# Altium PCB BMS_Slave_8S V0.1.PcbDoc (part 2 of 2)
Units mil, origin at the board's own origin, x right, y up, seen from the top; angles counter-clockwise.
Board outline 2125.98 x 4185.04 mil, 4 copper layers (Top Layer, L2 (GND), L2 (PWR), Bottom Layer), stack 53.912 mil thick; 165 components, 120 nets, 437 pads, 149 vias.
Unrouted connection lines stored in the file: 123.
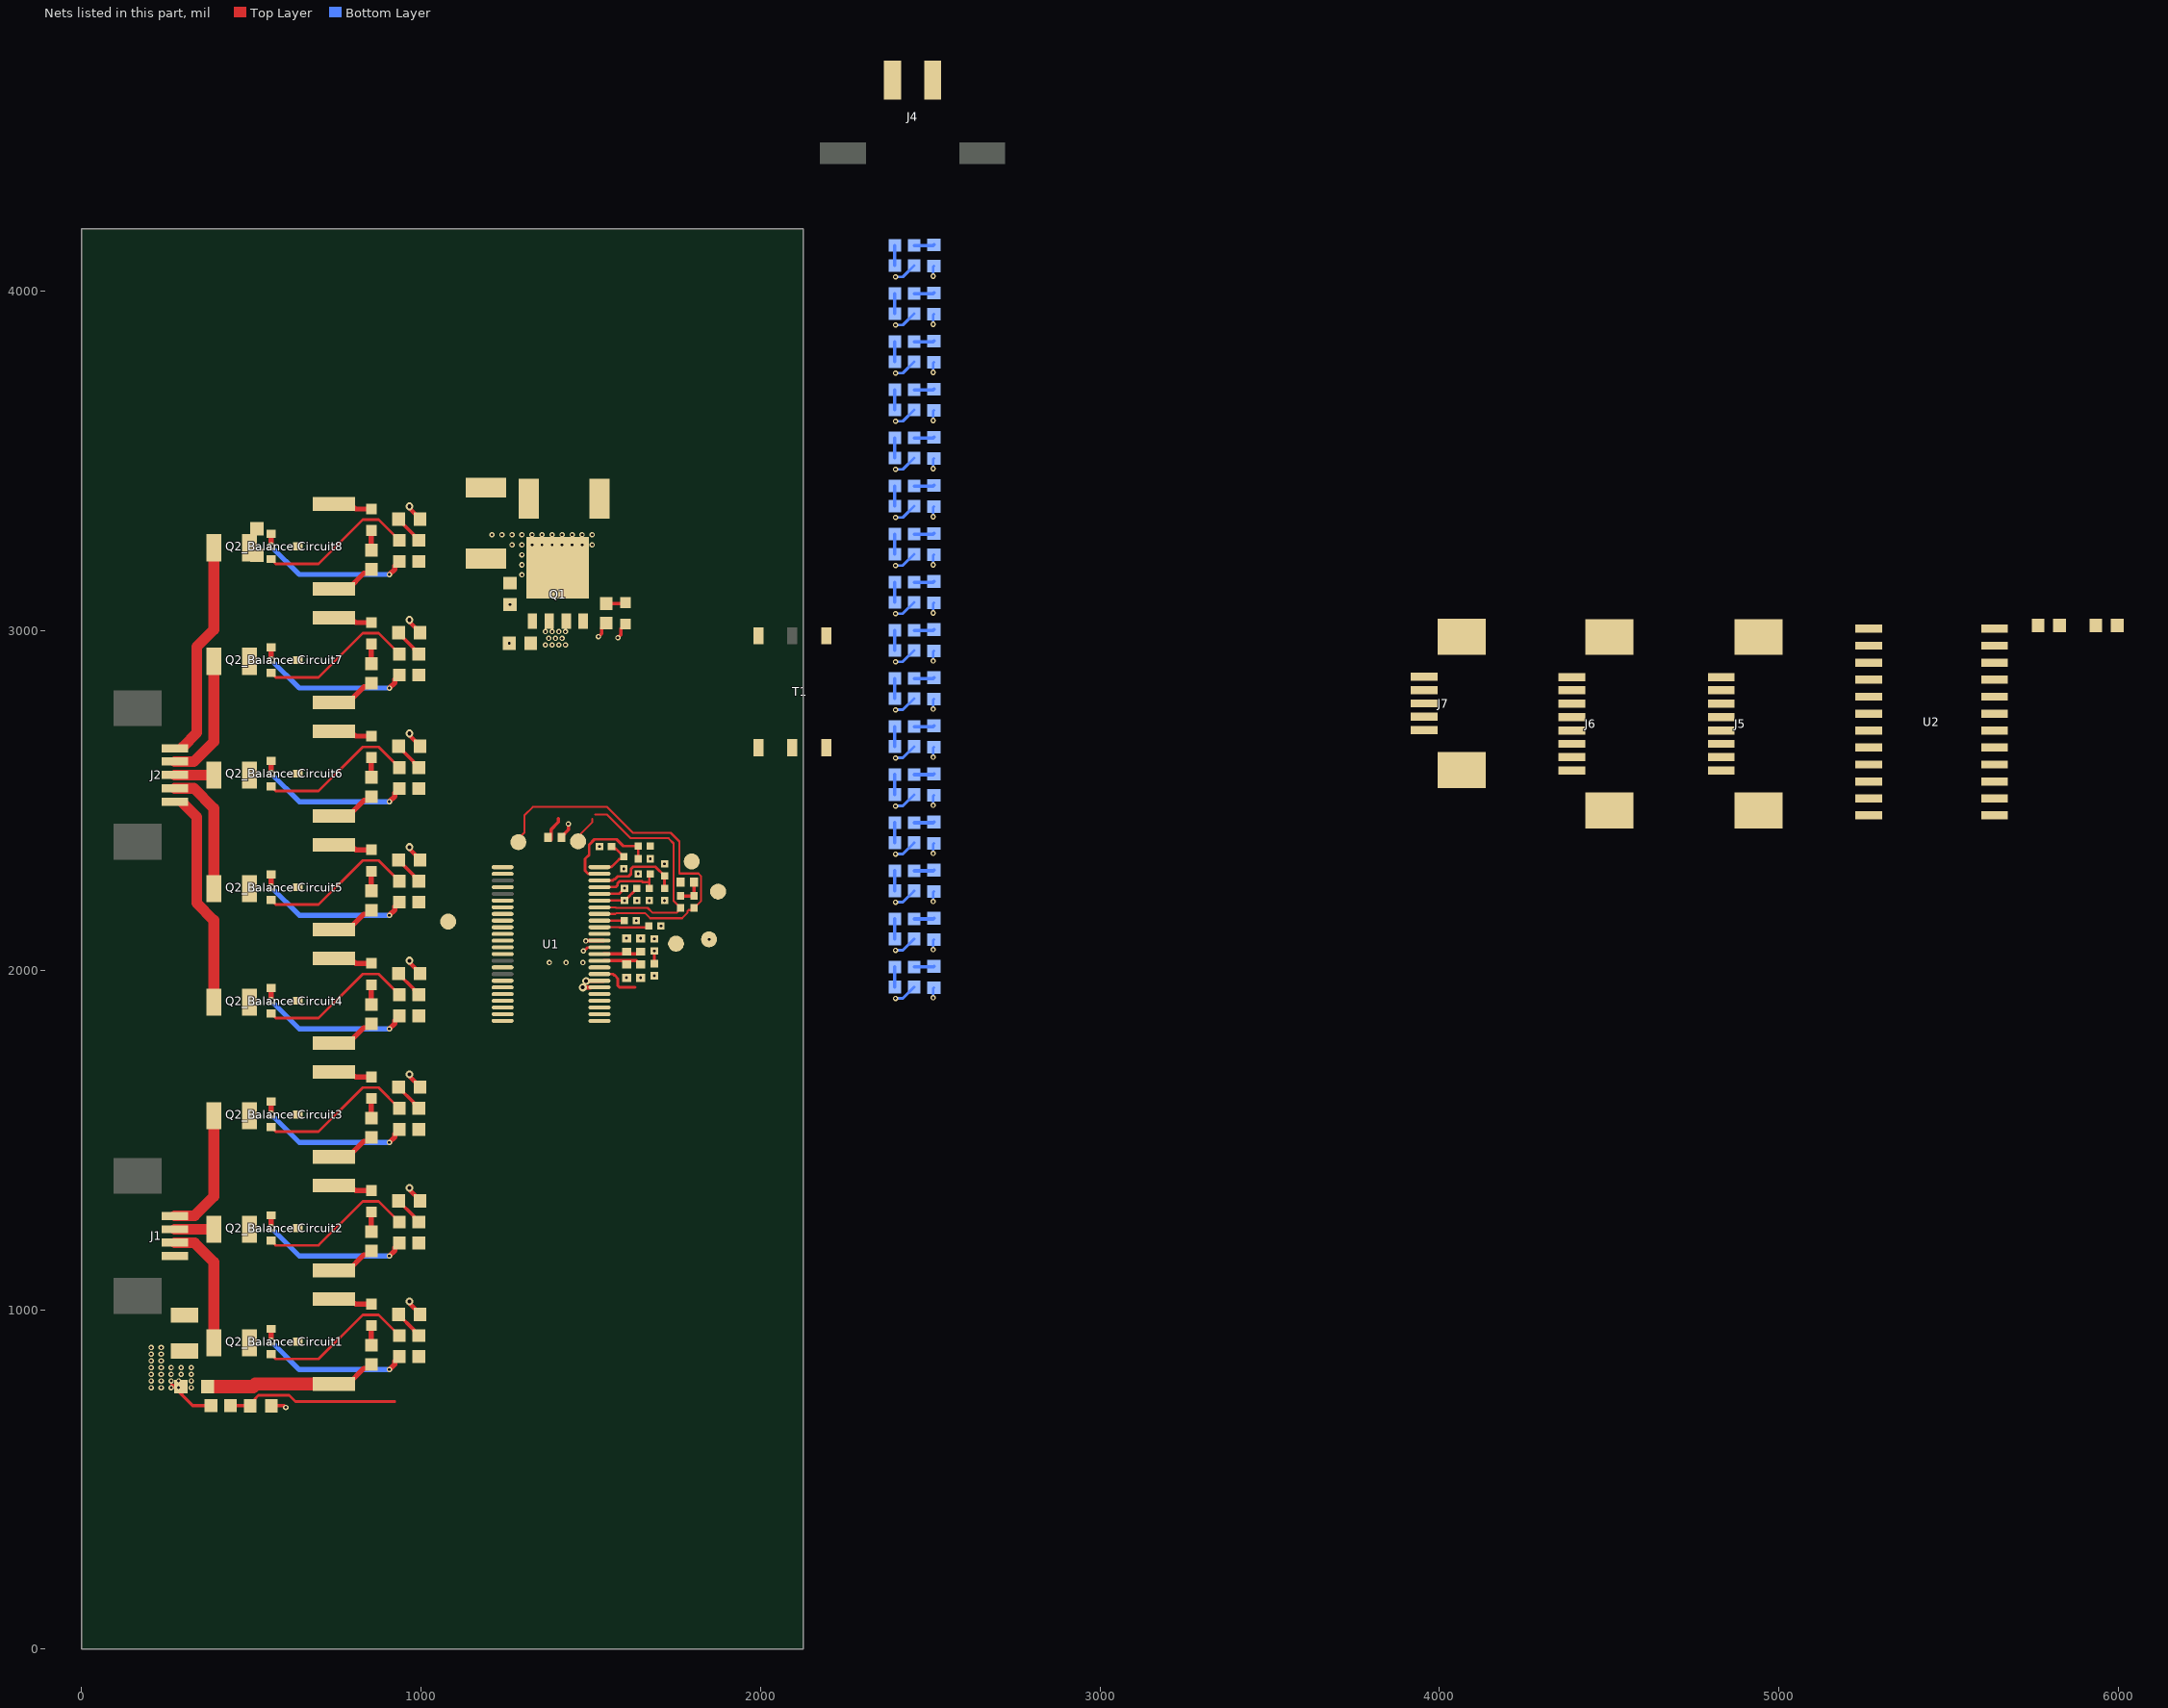
[diagram p4: the nets of this part, all layers, seen from the top]

## Part data
C1 C6: library part Capacitor, "Capacitor", Voltage=>60V, ComponentLink1Description="New link"
C2 C3 C4 C5 C8 C9 C10 C11 "C13_NTC Sense1" "C13_NTC Sense2" "C13_NTC Sense3" "C13_NTC Sense4" "C13_NTC Sense5" "C13_NTC Sense6" "C13_NTC Sense7" "C13_NTC Sense8" "C13_NTC Sense9" "C13_NTC Sense10" "C13_NTC Sense11" "C13_NTC Sense12" "C13_NTC Sense13" "C13_NTC Sense14" "C13_NTC Sense15" "C13_NTC Sense16": library part Capacitor, "Capacitor", ComponentLink1Description="New link"
C7: library part Capacitor, "Capacitor", Voltage=<50.4V, ComponentLink1Description="New link"
"C12_Balance Circuit1" "C12_Balance Circuit2" "C12_Balance Circuit3" "C12_Balance Circuit4" "C12_Balance Circuit5" "C12_Balance Circuit6" "C12_Balance Circuit7" "C12_Balance Circuit8": library part Capacitor, "Capacitor", Voltage=>50.4V, ComponentLink1Description="New link"
D1: "LED RED DIFFUSED 0603 SMD", Case Code (Imperial)=0603, Case Code (Metric)=1608, Color=Red, Forward Voltage=2V, Manufacturer="Wurth Electronics", Supplier Part Number 1=710-150060SS55040, Test Current=20mA, Case/Package=0603, Category=LEDs, Dominant Wavelength=630nm, Height=0.5mm, Length=1.6mm, Lens Size=0.8mm, Lens Style=Flat, Lens Transparency=Diffused, Luminous Intensity=70mcd, Manufacturer Part Number=150060SS55040, Mount="Surface Mount", Packaging="Tape and Reel", Pricing 1="1=0.18000, 10=0.16800, 50=0.16800, 100=0.15200, 1000=0.12100, 10000=0.10600 (USD)", RoHS=No, RoHS Compliant=No, Stock 1=17006, Supplier 1=Mouser, Viewing Angle=140°, Width=0.8mm
"D2_Balance Circuit1" "D2_Balance Circuit2" "D2_Balance Circuit3" "D2_Balance Circuit4" "D2_Balance Circuit5" "D2_Balance Circuit6" "D2_Balance Circuit7" "D2_Balance Circuit8": "LED BLUE DIFFUSED 0603 SMD", Case/Package=0603, Color=Blue, Forward Voltage=3.2V, Manufacturer="Wurth Electronics", Supplier Part Number 1=710-150060BS55040, Test Current=20mA, ComponentLink1Description=http://www.farnell.com/datasheets/2621640.pdf?src-supplier=Farnell, ComponentLink1URL=http://www.farnell.com/datasheets/2621640.pdf?src-supplier=Farnell, ComponentLink2Description=https://www.we-online.de/web/en/index.php/download/media/07_electronic_components/download_center_1/application_notes_berichte/ano002_leds___the_future_of_horticultural_lighting/ANO002b_EN_LEDs_The_Future_of_Horticultural_Lighting.pdf?src-supplier=Digi-Key, ComponentLink2URL=https://www.we-online.de/web/en/index.php/download/media/07_electronic_components/download_center_1/application_notes_berichte/ano002_leds___the_future_of_horticultural_lighting/ANO002b_EN_LEDs_The_Future_of_Horticultural_Lighting.pdf?src-supplier=Digi-Key, ComponentLink3Description=https://katalog.we-online.de/pbs/datasheet/150060BS55040.pdf?src-supplier=Digi-Key, ComponentLink3URL=https://katalog.we-online.de/pbs/datasheet/150060BS55040.pdf?src-supplier=Digi-Key, ComponentLink4Description=http://www.farnell.com/datasheets/2621640.pdf?src-supplier=Newark, ComponentLink4URL=http://www.farnell.com/datasheets/2621640.pdf?src-supplier=Newark, Dominant Wavelength=470nm, Height=0.5mm, Length=1.6mm, Lens Size=0.8mm, Lens Style=Flat, Lens Transparency=Diffused, Luminous Intensity=80mcd, Manufacturer Part Number=150060BS55040, Mount="Surface Mount", Packaging="Tape and Reel", Pricing 1="1=0.18000, 10=0.16800, 50=0.16800, 100=0.15200, 1000=0.12100, 10000=0.10600 (USD)", RoHS=No, RoHS Compliant=No, Supplier 1=Mouser, Viewing Angle=140°, Width=0.8mm
F1 "F2_Balance Circuit1" "F2_Balance Circuit2" "F2_Balance Circuit3" "F2_Balance Circuit4" "F2_Balance Circuit5" "F2_Balance Circuit6" "F2_Balance Circuit7" "F2_Balance Circuit8": library part "Fuse 2", "LITTELFUSE - 0466.500NR - Fuse, Surface Mount, 500 mA, 466 Series, 63 VAC, 63 VDC, Very Fast Acting, 1206", Case Code (Imperial)=1206, Case Code (Metric)=3216, Current Rating=500mA, DC Cold Resistance=248mR, Manufacturer=Littelfuse, Max Operating Temperature=90°C, Min Operating Temperature=-55°C, Package Quantity=5000, Resistance=350mR, Supplier Part Number 1=576-0466.500NR, Voltage Rating=63V, Approvals=UL,CSA, Body Material=Thermoplastic, Case/Package=1206, Category=Fuses, ComponentLink1Description=https://datasheet.ciiva.com/17081/0466-500nr-17081083.pdf?src-supplier=Allied+Electronics, ComponentLink1URL=https://datasheet.ciiva.com/17081/0466-500nr-17081083.pdf?src-supplier=Allied+Electronics, ComponentLink2Description=https://datasheet.ciiva.com/16327/littelfuse-fuse-466-16327478.pdf?src-supplier=Future+Electronics, ComponentLink2URL=https://datasheet.ciiva.com/16327/littelfuse-fuse-466-16327478.pdf?src-supplier=Future+Electronics, ComponentLink3Description=https://datasheet.ciiva.com/299/466seriesdrawing-299207.pdf?src-supplier=Digi-Key, ComponentLink3URL=https://datasheet.ciiva.com/299/466seriesdrawing-299207.pdf?src-supplier=Digi-Key, ComponentLink4Description=https://datasheet.ciiva.com/299/466seriesdrawing-299208.pdf?src-supplier=Digi-Key, ComponentLink4URL=https://datasheet.ciiva.com/299/466seriesdrawing-299208.pdf?src-supplier=Digi-Key, ComponentLink5Description=https://datasheet.ciiva.com/299/466seriesdrawing-299209.pdf?src-supplier=Digi-Key, ComponentLink5URL=https://datasheet.ciiva.com/299/466seriesdrawing-299209.pdf?src-supplier=Digi-Key, ComponentLink6Description=https://datasheet.ciiva.com/14102/ei466-dat-e-14102891.pdf?src-supplier=Distrelec, ComponentLink6URL=https://datasheet.ciiva.com/14102/ei466-dat-e-14102891.pdf?src-supplier=Distrelec, ComponentLink7Description=https://datasheet.ciiva.com/15186/getdatasheetpartid-57351-15186924.pdf?src-supplier=Verical, ComponentLink7URL=https://datasheet.ciiva.com/15186/getdatasheetpartid-57351-15186924.pdf?src-supplier=Verical, Depth=1.52mm, Fuse Current=500mA, Fuse Type="Board Mount (Cartridge Style Excluded)", Height=0.023inch, Housing Material=Ceramic, LatestRevisionDate=17-Jul-2002, LatestRevisionNote="Re-released for DXP Platform.", Lead Free="Lead Free", Length=3.18mm, Manufacturer Part Number=0466.500NR, Mount="Surface Mount", Number of Pins=2, PackageDescription="Thru-Hole; 2 Leads", PackageReference=PIN-W2/E2.8, Packaging="Tape and Reel", Pricing 1="1=0.77000, 10=0.59200, 50=0.59200, 100=0.48900, 1000=0.41600, 10000=0.39000 (USD)", Published=8-Jun-2000, Publisher="Altium Limited", Radiation Hardening=No, REACH SVHC=Unknown, RoHS=Yes, RoHS Compliant=Yes, Series=466, Stock 1=36497, Supplier 1=Mouser, Terminal Material=Copper, Termination=SMD/SMT, Voltage Rating (AC)=63V, Voltage Rating (DC)=63V, Width=0.06inch, Working Voltage=63V
J1: "FPC Connectors, Flex-to-Board, 4 Position, .039 in [1 mm] Centerline, Zero Insertion Force (ZIF), Right Angle, Surface Mount", Package=None, Availability=Unavailable, MF="{'manufacturer': u'TE Connectivity'}", MP=84953-4, Price=None
J2 J7: "FPC Connectors, Flex-to-Board, 5 Position, .039 in [1 mm] Centerline, Zero Insertion Force (ZIF), Right Angle, Surface Mount."
J4: "CONN HEADER 3MM 2POS R/A TIN SMD", Package=None, Availability=Unavailable, MF="{'manufacturer': u'TE Connectivity'}", MP=2-1445057-2, Price=None
J5 J6: "FPC Connectors, Flex-to-Board, 8 Position, .039 in [1 mm] Centerline, Zero Insertion Force (ZIF), Right Angle, Surface Mount", Color=Natural, Contact Current Rating=1A, Flammability Rating="UL94 V-0", Manufacturer="TE Connectivity", Max Operating Temperature=85°C, Min Operating Temperature=-40°C, Package Quantity=1500, Supplier Part Number 1=5351707P, Voltage Rating=200V, Body Plating=Tin, Category="FFC / FPC", ComponentLink1Description=https://datasheet.ciiva.com/11745/0900766b806b36e9-11745458.pdf?src-supplier=RSComponents, ComponentLink1URL=https://datasheet.ciiva.com/11745/0900766b806b36e9-11745458.pdf?src-supplier=RSComponents, ComponentLink2Description=https://datasheet.ciiva.com/669/eng-cd-84953-a3-669123.pdf?src-supplier=Digi-Key, ComponentLink2URL=https://datasheet.ciiva.com/669/eng-cd-84953-a3-669123.pdf?src-supplier=Digi-Key, ComponentLink3Description=https://datasheet.ciiva.com/669/eng-cd-84953-a3-669124.pdf?src-supplier=Digi-Key, ComponentLink3URL=https://datasheet.ciiva.com/669/eng-cd-84953-a3-669124.pdf?src-supplier=Digi-Key, ComponentLink4Description=https://datasheet.ciiva.com/14483/eng-ds-1-1773440-6-0506-14483319.pdf?src-supplier=Farnell, ComponentLink4URL=https://datasheet.ciiva.com/14483/eng-ds-1-1773440-6-0506-14483319.pdf?src-supplier=Farnell, ComponentLink5Description=https://datasheet.ciiva.com/26825/getdatasheetpartid-473787-26825575.pdf?src-supplier=Verical, ComponentLink5URL=https://datasheet.ciiva.com/26825/getdatasheetpartid-473787-26825575.pdf?src-supplier=Verical, ComponentLink6Description=https://datasheet.ciiva.com/8066/586796-8066664.pdf?src-supplier=Element14, ComponentLink6URL=https://datasheet.ciiva.com/8066/586796-8066664.pdf?src-supplier=Element14, ComponentLink7Description=https://datasheet.ciiva.com/669/eng-cd-84953-a3-669122.pdf?src-supplier=Digi-Key, ComponentLink7URL=https://datasheet.ciiva.com/669/eng-cd-84953-a3-669122.pdf?src-supplier=Digi-Key, ComponentLink8Description=https://datasheet.ciiva.com/16658/eng-ds-1-1773440-6-0506-16658613.pdf?src-supplier=Avnet+Europe, ComponentLink8URL=https://datasheet.ciiva.com/16658/eng-ds-1-1773440-6-0506-16658613.pdf?src-supplier=Avnet+Europe, ComponentLink9Description=https://datasheet.ciiva.com/8066/586796-8066666.pdf?src-supplier=Element14, ComponentLink9URL=https://datasheet.ciiva.com/8066/586796-8066666.pdf?src-supplier=Element14, ComponentLink10Description=https://datasheet.ciiva.com/30100/eng-ds-1-1773440-6-0506-30100492.pdf?src-supplier=Onlinecomponents.com, ComponentLink10URL=https://datasheet.ciiva.com/30100/eng-ds-1-1773440-6-0506-30100492.pdf?src-supplier=Onlinecomponents.com, ComponentLink11Description=https://datasheet.ciiva.com/10034/eng-ds-1-1773440-6-0506-10034351.pdf?src-supplier=Avnet, ComponentLink11URL=https://datasheet.ciiva.com/10034/eng-ds-1-1773440-6-0506-10034351.pdf?src-supplier=Avnet, Connector System=Flex-to-Board, Connector Type=Receptacle,Connector,Socket, Contact Location=Top, Contact Material=Bronze, Contact Plating=Tin,Bright, Current Rating=1A, Depth=2.56mm, Gender=Female, Height=2.56mm, Housing Color=Natural, Housing Material=Polymer, Lead Pitch=1mm, Length=0.6268inch, Manufacturer Part Number=84953-8, Material=Thermoplastic, Mating Alignment="Yes (With)", Mount="Surface Mount", Number of Contacts=8, Number of Positions=8, Number of Rows=1, Orientation="Right Angle", Packaging="Tape and Reel", PCB Mount Alignment="No (Without)", PCB Mount Retention=With, PCB Mounting Orientation="Right Angle", Pitch=0.039inch, Plating Thickness=2um, Pricing 1="10=0.83500, 200=0.65000, 750=0.58600, 3000=0.55400, 6000=0.54000 (USD)", Radiation Hardening=No, REACH SVHC="No SVHC", RoHS=Yes, Sealable="No (Without)", Shielding=Unshielded, Shrouded="Yes (With)", Stock 1=1, Supplier 1=RSComponents, Termination=SMD/SMT, Width=0.2575inch, Wire/Cable Type="Flat Flex"
Q1: "60V, 3 A NPN high power bipolar transistor"
"Q2_Balance Circuit1" "Q2_Balance Circuit2" "Q2_Balance Circuit3" "Q2_Balance Circuit4" "Q2_Balance Circuit5" "Q2_Balance Circuit6" "Q2_Balance Circuit7" "Q2_Balance Circuit8": library part CMP-14409-000018-1, "MOSFET P-CH 20V 2A TO-236AB"
T1: "BMS XFORMER 1-CH 1000V AECQ +125", Inductance=150uH, Manufacturer=Bourns, Max Operating Temperature=125°C, Min Operating Temperature=-40°C, Supplier Part Number 1=1802382, Category=Transformers, ComponentLink1Description=https://www.bourns.com/docs/Product-Datasheets/SM91502AL.pdf?src-supplier=Digi-Key, ComponentLink1URL=https://www.bourns.com/docs/Product-Datasheets/SM91502AL.pdf?src-supplier=Digi-Key, Manufacturer Part Number=SM91502ALE, Mount="Surface Mount", Packaging="Cut Tape", Pricing 1="800=2.35100 (USD)", RoHS=Yes, Stock 1=1, Supplier 1=RSComponents, Turns Ratio=1:1
TP1 TP2 TP3 TP4 TP5 TP6 TP7: library part "Test Point", "1.2mm Test point"
U1: "12 Channel Multicell Battery Monitor with Addressable Interface"
U2: "High-Speed CMOS Logic / 16-Channel Analog Multiplexer/Demultiplexer"

## Via types
v1: diameter 15.75, hole 7.87, Top Layer to Bottom Layer, tented both sides, 131 vias
v2: diameter 23.62, hole 11.81, Top Layer to Bottom Layer, tented both sides, 18 vias

## Nets (pads, with @x,y where several pads share a name; then routed paths per layer and width w, separated by ;. In a path a pad name is that pad's centre, name@x,y a point inside that pad or via, vN(x,y) a via of type N, cw(c..) or ccw(c..) an arc to the next point about the centre after c; other vN are vias at no path point)
5V0: C6.2 C10.1 C11.2 Q1.1 Q1.2 Q1.3 R2.2 R4.2 R5.2 R10.2 R11.2 R12.2 R13.2 R18.2 TP3.1 U1.37 U2.24 | length 102.3
  Top Layer w10: v1(1522.64,2983.27) 1531.57,2992.2 1531.57,3009.92 R4.2@1545.28,3023.62
  Top Layer w12: v1(1485.24,2086.61) 1486.13,2087.5 1537.31,2087.5 U1.37@1537.4,2087.6
  other v1: 1687.01,1984.25 1848.43,2091.54 1706.69,2130.9 1633.86,2146.65 1639.76,2284.45 1717.19,2313.98 1525.59,2365.16 1366.14,2958.66 1385.83,2958.66 1405.51,2958.66 1425.2,2958.66 1375.98,2978.35 1395.67,2978.35 1415.35,2978.35 1366.14,2998.03 1385.83,2998.03 1405.51,2998.03 1425.2,2998.03
A0: R10.1 R14.2 U1.45 | length 184.2
  Top Layer w8: U1.45@1537.4,2245.08 1538.13,2245.81 1573.9,2245.81 1578.58,2250.49 1578.58,2256.11 1585.42,2262.95 1650.8,2262.95 1653.91,2259.84 1672.24,2259.84 ; R14.2@1672.24,2241.14 1672.24,2259.84 ; R10.1@1672.24,2278.54 1672.24,2259.84
A1: R11.1 R15.2 U1.46 | length 253.8
  Top Layer w8: U1.46@1537.4,2264.76 1565.01,2264.76 1568.79,2268.54 1571.22,2268.54 1579.63,2276.95 1611.31,2276.95 1618.6,2284.24 1618.6,2299.08 1624.79,2305.28 1690.17,2305.28 1696.19,2299.25 1696.19,2299.18 1702.22,2293.15 1702.59,2293.15 R11.1@1717.2,2278.54 R15.2@1717.2,2241.14
A2: R12.1 R16.2 U1.47 | length 336.4
  Top Layer w8: U1.47@1537.4,2284.45 1536.67,2285.18 1491.98,2285.18 1483.11,2294.05 1483.11,2328.58 1494.92,2340.39 1494.92,2370.28 1510.62,2385.98 1575.99,2385.98 1595.84,2366.14 R12.1@1639.76,2366.14 R16.2@1639.76,2328.74
A3: R13.1 R17.2 U1.48 | length 121.7
  Top Layer w8: U1.48@1537.4,2304.13 1538.13,2304.86 1559.78,2304.86 1560.82,2305.89 1562.01,2305.89 1583.93,2327.82 1590.61,2327.82 R17.2@1597.44,2334.65 1573.76,2358.33 1567.85,2358.33 R13.1@1561.02,2365.16
B1: "R23_Balance Circuit1.1" "R24_Balance Circuit1.1" NT1.2 | length 489.5
  Top Layer w15: 742.87,781.5 785.39,781.5 831.28,827.38 842.15,827.38 853.35,838.58
  Top Layer w39.37: NT1.2@390.75,773.62 504.47,773.62 512.35,781.5 742.87,781.5
B2: "F2_Balance Circuit1.2" "Q2_Balance Circuit1.2" "R21_Balance Circuit1.1" "R23_Balance Circuit2.1" "R24_Balance Circuit2.1" | length 623.6
  Top Layer w8: 558.07,869.09 571.85,855.31 697.83,855.31 827.76,985.24 875,985.24 936.02,924.21
  Top Layer w15: 742.87,1116.14 785.39,1116.14 831.28,1162.03 ; 831.28,1162.03 842.15,1162.03 ; 831.28,1162.03 842.15,1162.03 ; 842.15,1162.03 853.35,1173.23 842.15,1162.03
B3: "F2_Balance Circuit2.2" "Q2_Balance Circuit2.2" "R21_Balance Circuit2.1" "R23_Balance Circuit3.1" "R24_Balance Circuit3.1" | length 623.6
  Top Layer w8: 558.07,1203.74 571.85,1189.96 697.83,1189.96 827.76,1319.88 875,1319.88 936.02,1258.86
  Top Layer w15: 742.87,1450.79 785.39,1450.79 831.28,1496.67 ; 831.28,1496.67 842.15,1496.67 ; 831.28,1496.67 842.15,1496.67 ; 842.15,1496.67 853.35,1507.87 842.15,1496.67
B4: "F2_Balance Circuit3.2" "Q2_Balance Circuit3.2" "R21_Balance Circuit3.1" "R23_Balance Circuit4.1" "R24_Balance Circuit4.1" | length 623.6
  Top Layer w8: 558.07,1538.39 571.85,1524.61 697.83,1524.61 827.76,1654.53 875,1654.53 936.02,1593.5
  Top Layer w15: 742.87,1785.43 785.39,1785.43 831.28,1831.32 ; 831.28,1831.32 842.15,1831.32 ; 831.28,1831.32 842.15,1831.32 ; 842.15,1831.32 853.35,1842.52 842.15,1831.32
B5: "F2_Balance Circuit4.2" "Q2_Balance Circuit4.2" "R21_Balance Circuit4.1" "R23_Balance Circuit5.1" "R24_Balance Circuit5.1" | length 623.6
  Top Layer w8: 558.07,1873.03 571.85,1859.25 697.83,1859.25 827.76,1989.17 875,1989.17 936.02,1928.15
  Top Layer w15: 742.87,2120.08 785.39,2120.08 831.28,2165.96 ; 831.28,2165.96 842.15,2165.96 ; 831.28,2165.96 842.15,2165.96 ; 842.15,2165.96 853.35,2177.17 842.15,2165.96
B6: "F2_Balance Circuit5.2" "Q2_Balance Circuit5.2" "R21_Balance Circuit5.1" "R23_Balance Circuit6.1" "R24_Balance Circuit6.1" | length 623.6
  Top Layer w8: 558.07,2207.68 571.85,2193.9 697.83,2193.9 827.76,2323.82 875,2323.82 936.02,2262.8
  Top Layer w15: 742.87,2454.72 785.39,2454.72 831.28,2500.61 ; 831.28,2500.61 842.15,2500.61 ; 831.28,2500.61 842.15,2500.61 ; 842.15,2500.61 853.35,2511.81 842.15,2500.61
B7: "F2_Balance Circuit6.2" "Q2_Balance Circuit6.2" "R21_Balance Circuit6.1" "R23_Balance Circuit7.1" "R24_Balance Circuit7.1" | length 623.6
  Top Layer w8: 558.07,2542.32 571.85,2528.54 697.83,2528.54 827.76,2658.46 875,2658.46 936.02,2597.44
  Top Layer w15: 742.87,2789.37 785.39,2789.37 831.28,2835.26 ; 831.28,2835.26 842.15,2835.26 ; 831.28,2835.26 842.15,2835.26 ; 842.15,2835.26 853.35,2846.46 842.15,2835.26
B8: "F2_Balance Circuit7.2" "Q2_Balance Circuit7.2" "R21_Balance Circuit7.1" "R23_Balance Circuit8.1" "R24_Balance Circuit8.1" | length 623.6
  Top Layer w8: 558.07,2876.97 571.85,2863.19 697.83,2863.19 827.76,2993.11 875,2993.11 936.02,2932.09
  Top Layer w15: 742.87,3124.02 785.39,3124.02 831.28,3169.9 ; 831.28,3169.9 842.15,3169.9 ; 831.28,3169.9 842.15,3169.9 ; 842.15,3169.9 853.35,3181.1 842.15,3169.9
C0: C7.2 R21.2 U1.26 | length 482.1
  Top Layer w8: 510.37,737.54 520.71,747.88 611.38,747.88 629.53,729.73 922.39,729.73
  Top Layer w10: R21.2@437.99,717.92 495.67,717.92 C7.2@496.06,717.52
C1: "C12_Balance Circuit1.2" "R21_Balance Circuit1.2" U1.24 | length 66.3
  Top Layer w10: 933.82,986.73 933.82,985.75 978.41,941.16 978.41,938.91
C2: "C12_Balance Circuit2.2" "R21_Balance Circuit2.2" U1.22 | length 66.3
  Top Layer w10: 933.82,1321.38 933.82,1320.39 978.41,1275.8 978.41,1273.56
C3: "C12_Balance Circuit3.2" "R21_Balance Circuit3.2" U1.20 | length 66.3
  Top Layer w10: 933.82,1656.02 933.82,1655.04 978.41,1610.45 978.41,1608.2
C4: "C12_Balance Circuit4.2" "R21_Balance Circuit4.2" U1.14 U1.16 U1.18 | length 66.3
  Top Layer w10: 933.82,1990.67 933.82,1989.68 978.41,1945.09 978.41,1942.85
C5: "C12_Balance Circuit5.2" "R21_Balance Circuit5.2" U1.12 | length 66.3
  Top Layer w10: 933.82,2325.32 933.82,2324.33 978.41,2279.74 978.41,2277.5
C6: "C12_Balance Circuit6.2" "R21_Balance Circuit6.2" U1.10 | length 66.3
  Top Layer w10: 933.82,2659.96 933.82,2658.98 978.41,2614.39 978.41,2612.14
C7: "C12_Balance Circuit7.2" "R21_Balance Circuit7.2" U1.8 | length 66.3
  Top Layer w10: 933.82,2994.61 933.82,2993.62 978.41,2949.03 978.41,2946.79
C8: "C12_Balance Circuit8.2" "R21_Balance Circuit8.2" U1.2 U1.4 U1.6 | length 66.3
  Top Layer w10: 933.82,3329.25 933.82,3328.27 978.41,3283.68 978.41,3281.43
Drive: Q1.4 U1.38
GND: "C12_Balance Circuit1.1" "C12_Balance Circuit2.1" "C12_Balance Circuit3.1" "C12_Balance Circuit4.1" "C12_Balance Circuit5.1" "C12_Balance Circuit6.1" "C12_Balance Circuit7.1" "C12_Balance Circuit8.1" "C13_NTC Sense1.1" "C13_NTC Sense2.1" "C13_NTC Sense3.1" "C13_NTC Sense4.1" "C13_NTC Sense5.1" "C13_NTC Sense6.1" "C13_NTC Sense7.1" "C13_NTC Sense8.1" "C13_NTC Sense9.1" "C13_NTC Sense10.1" "C13_NTC Sense11.1" "C13_NTC Sense12.1" "C13_NTC Sense13.1" "C13_NTC Sense14.1" "C13_NTC Sense15.1" "C13_NTC Sense16.1" C1.1 C2.1 C3.1 C4.1 C5.1 C6.1 C7.1 C8.1 C9.1 C10.2 C11.1 D1.1 F1.2 J5.6 J5.7 J5.8 J5.S1 J5.S2 J6.8 J6.S1 J6.S2 J7.5 J7.S1 J7.S2 NT1.1 R6.1 R7.2 R14.1 R15.1 R16.1 R17.1 R21.1 U1.30 U1.31 U2.12 U2.15 | length 1248.2
  Top Layer w10: 266.73,778.54 327.36,717.92 R21.1@380.91,717.92 ; C7.1@559.06,717.52 596.46,717.52 v1(601.38,712.6) ; C9.1@1413.39,2391.73 1413.39,2393.7 1433.7,2414.02 v1(1433.7,2431.73) ; v1(1579.72,2980.31) 1588.66,2989.25 1588.66,3006.97 D1.1@1602.36,3020.67
  Top Layer w12: v2(965.55,1024.61) 967.77,1022.38 967.77,1016.75 996.81,987.72 996.81,986.73 ; v2(965.55,1359.25) 967.77,1357.03 967.77,1351.4 996.81,1322.36 996.81,1321.38 ; v2(965.55,1693.9) 967.77,1691.67 967.77,1686.04 996.81,1657.01 996.81,1656.02 ; v2(965.55,2028.54) 967.77,2026.32 967.77,2020.69 996.81,1991.65 996.81,1990.67 ; v2(965.55,2363.19) 967.77,2360.97 967.77,2355.34 996.81,2326.3 996.81,2325.32 ; v2(965.55,2697.83) 967.77,2695.61 967.77,2689.98 996.81,2660.95 996.81,2659.96 ; v2(965.55,3032.48) 967.77,3030.26 967.77,3024.63 996.81,2995.59 996.81,2994.61 ; v2(965.55,3367.13) 967.77,3364.9 967.77,3359.27 996.81,3330.24 996.81,3329.25 ; v2(1476.38,1949.8) U1.30@1499.11,1949.8 ; v2(1486.22,1968.5) 1487.2,1969.49 U1.31@1537.4,1969.49
  Bottom Layer w8: v1(2508.86,1919.29) 2508.86,1946.85 2510.83,1948.82 ; v1(2508.86,2061.02) 2508.86,2088.58 2510.83,2090.55 ; v1(2508.86,2202.76) 2508.86,2230.31 2510.83,2232.28 ; v1(2508.86,2344.49) 2508.86,2372.05 2510.83,2374.02 ; v1(2508.86,2486.22) 2508.86,2513.78 2510.83,2515.75 ; v1(2508.86,2627.95) 2508.86,2655.51 2510.83,2657.48 ; v1(2508.86,2769.68) 2508.86,2797.24 2510.83,2799.21 ; v1(2508.86,2911.42) 2508.86,2938.98 2510.83,2940.95 ; v1(2508.86,3053.15) 2508.86,3080.71 2510.83,3082.68 ; v1(2508.86,3194.88) 2508.86,3222.44 2510.83,3224.41 ; v1(2508.86,3336.61) 2508.86,3364.17 2510.83,3366.14 ; v1(2508.86,3478.35) 2508.86,3505.91 2510.83,3507.87 ; v1(2508.86,3620.08) 2508.86,3647.64 2510.83,3649.61 ; v1(2508.86,3761.81) 2508.86,3789.37 2510.83,3791.34 ; v1(2508.86,3903.54) 2508.86,3931.1 2510.83,3933.07 ; v1(2508.86,4045.28) 2508.86,4072.83 2510.83,4074.8
  other v1: 204.73,770.67 234.25,770.67 263.78,770.67 285.43,770.67 322.84,770.67 204.73,790.36 234.25,790.36 263.78,790.36 285.43,790.36 322.84,790.36 204.73,810.04 234.25,810.04 263.78,810.04 293.31,810.04 322.84,810.04 204.73,829.73 234.25,829.73 263.78,829.73 293.31,829.73 322.84,829.73 204.73,849.41 234.25,849.41 204.73,869.1 234.25,869.1 204.72,888.78 234.25,888.78 1605.32,1978.35 1646.65,1978.35 1687.01,2092.52 1605.32,2094.49 1646.65,2094.49 1635.83,2205.71 1672.24,2205.71 1717.19,2205.71 1597.44,2299.21 1675.2,2328.74 1259.84,2963.58 1261.81,3077.76
GPIO.1: U1.27 U2.10
GPIO.2: U1.28 U2.11
GPIO.3: U1.29 U2.14
GPIO.4: U1.32 U2.13 | length 121.4
  Top Layer w8: U1.32@1537.4,1989.17 1565.01,1989.17 1568.79,1985.39 1570.56,1985.39 1579.88,1976.08 1579.88,1955.32 1584.57,1950.63 1630.68,1950.63
IBIAS: R8.1 TP4.1 U1.44 | length 68.9
  Top Layer w8: U1.44@1537.4,2225.39 1538.13,2226.12 1583.41,2226.12 v1(1599.41,2242.13)
ICMP: R7.1 R8.2 TP5.1 U1.43 | length 113
  Top Layer w8: U1.43@1537.4,2205.71 1537.89,2206.2 R8.2@1598.92,2206.2 ; v1(1599.41,2205.71) 1606.24,2212.54 1607.22,2212.54 1615,2220.31 1615,2220.68 1620.86,2226.54 1621.22,2226.54 R7.1@1635.83,2241.14
ISOMD: R18.1 U1.40 | length 61
  Top Layer w6: U1.40@1537.4,2146.65 R18.1@1598.43,2146.65
isoSPI._N: R20.2 T1.4 TP7.1 U1.41 | length 1157.7
  Top Layer w6: TP7.1@1286.42,2377.95 1286.42,2387.87 1304.53,2405.98 1304.53,2446.85 ; 1304.53,2436.81 1304.53,2456.89 1328.94,2481.3 1548.22,2481.3 1624.24,2405.28 1735.47,2405.28 1760.83,2379.92 1760.83,2285.43 1816.86,2285.43 1825.01,2277.29 1825.01,2204.93 1797.78,2177.7 1788.11,2177.7 1784.59,2174.19 1784.59,2169.5 1768.63,2153.54 1675.2,2153.54 1660.56,2168.18 1574.72,2168.18 1572.88,2166.34 U1.41@1537.4,2166.34
isoSPI._P: R19.2 T1.6 TP6.1 U1.42 | length 791.2
  Top Layer w6: TP6.1@1462.6,2379.92 1470.49,2387.81 1470.49,2402.77 1504.53,2436.81 1504.53,2446.85 ; 1512.8,2458.66 1548.23,2458.66 1617.61,2389.28 1728.84,2389.28 1743.89,2374.23 1743.89,2204.93 R19.2@1764.76,2184.05 1756.94,2176.23 1756.94,2173.06 1753.42,2169.54 1681.82,2169.54 1667.19,2184.18 1574.72,2184.18 1572.88,2186.02 U1.42@1537.4,2186.02
NetC1_2: C1.2 Q1.5 R1.1
  other v1: 1297.24,3165.35 1297.24,3194.88 1297.24,3224.41 1267.72,3253.94 1297.24,3253.94 1326.77,3253.94 1356.3,3253.94 1385.83,3253.94 1415.35,3253.94 1444.88,3253.94 1474.41,3253.94 1503.94,3253.94 1208.66,3283.47 1238.19,3283.47 1267.72,3283.47 1297.24,3283.47 1326.77,3283.47 1356.3,3283.47 1385.83,3283.47 1415.35,3283.47 1444.88,3283.47 1474.41,3283.47 1503.94,3283.47
NetC8_2: C8.2 R19.1 R20.1 | length 79.7
  Top Layer w10: R19.1@1764.76,2219.49 R20.1@1804.13,2219.49 C8.2@1804.13,2259.84
NetC9_2: C9.2 T1.5 | length 71.7
  Top Layer w10: C9.2@1383.19,2384.45 1382.87,2384.45 1382.87,2415.16 1404.53,2436.81 1404.53,2446.85
NetD1_2: D1.2 R4.1 | length 58.3
  Top Layer w10: R4.1@1545.28,3080.71 1599.41,3080.71 D1.2@1602.36,3083.66
"NetD2_Balance Circuit1_1": "D2_Balance Circuit1.1" "R24_Balance Circuit1.2" | length 58.1
  Top Layer w15: 853.35,895.67 853.35,953.74
"NetD2_Balance Circuit1_2": "D2_Balance Circuit1.2" "Q2_Balance Circuit1.3" "R23_Balance Circuit1.2" | length 116.6
  Top Layer w15: 742.87,1031.5 785.39,1031.5 797.97,1018.92 804.57,1018.92 806.76,1016.73 853.35,1016.73
"NetD2_Balance Circuit2_1": "D2_Balance Circuit2.1" "R24_Balance Circuit2.2" | length 58.1
  Top Layer w15: 853.35,1230.31 853.35,1288.39
"NetD2_Balance Circuit2_2": "D2_Balance Circuit2.2" "Q2_Balance Circuit2.3" "R23_Balance Circuit2.2" | length 116.6
  Top Layer w15: 742.87,1366.14 785.39,1366.14 797.97,1353.56 804.57,1353.56 806.76,1351.38 853.35,1351.38
"NetD2_Balance Circuit3_1": "D2_Balance Circuit3.1" "R24_Balance Circuit3.2" | length 58.1
  Top Layer w15: 853.35,1564.96 853.35,1623.03
"NetD2_Balance Circuit3_2": "D2_Balance Circuit3.2" "Q2_Balance Circuit3.3" "R23_Balance Circuit3.2" | length 116.6
  Top Layer w15: 742.87,1700.79 785.39,1700.79 797.97,1688.21 804.57,1688.21 806.76,1686.02 853.35,1686.02
"NetD2_Balance Circuit4_1": "D2_Balance Circuit4.1" "R24_Balance Circuit4.2" | length 58.1
  Top Layer w15: 853.35,1899.61 853.35,1957.68
"NetD2_Balance Circuit4_2": "D2_Balance Circuit4.2" "Q2_Balance Circuit4.3" "R23_Balance Circuit4.2" | length 116.6
  Top Layer w15: 742.87,2035.43 785.39,2035.43 797.97,2022.85 804.57,2022.85 806.76,2020.67 853.35,2020.67
"NetD2_Balance Circuit5_1": "D2_Balance Circuit5.1" "R24_Balance Circuit5.2" | length 58.1
  Top Layer w15: 853.35,2234.25 853.35,2292.32
"NetD2_Balance Circuit5_2": "D2_Balance Circuit5.2" "Q2_Balance Circuit5.3" "R23_Balance Circuit5.2" | length 116.6
  Top Layer w15: 742.87,2370.08 785.39,2370.08 797.97,2357.5 804.57,2357.5 806.76,2355.32 853.35,2355.32
"NetD2_Balance Circuit6_1": "D2_Balance Circuit6.1" "R24_Balance Circuit6.2" | length 58.1
  Top Layer w15: 853.35,2568.9 853.35,2626.97
"NetD2_Balance Circuit6_2": "D2_Balance Circuit6.2" "Q2_Balance Circuit6.3" "R23_Balance Circuit6.2" | length 116.6
  Top Layer w15: 742.87,2704.72 785.39,2704.72 797.97,2692.15 804.57,2692.15 806.76,2689.96 853.35,2689.96
"NetD2_Balance Circuit7_1": "D2_Balance Circuit7.1" "R24_Balance Circuit7.2" | length 58.1
  Top Layer w15: 853.35,2903.54 853.35,2961.61
"NetD2_Balance Circuit7_2": "D2_Balance Circuit7.2" "Q2_Balance Circuit7.3" "R23_Balance Circuit7.2" | length 116.6
  Top Layer w15: 742.87,3039.37 785.39,3039.37 797.97,3026.79 804.57,3026.79 806.76,3024.61 853.35,3024.61
"NetD2_Balance Circuit8_1": "D2_Balance Circuit8.1" "R24_Balance Circuit8.2" | length 58.1
  Top Layer w15: 853.35,3238.19 853.35,3296.26
"NetD2_Balance Circuit8_2": "D2_Balance Circuit8.2" "Q2_Balance Circuit8.3" "R23_Balance Circuit8.2" | length 116.6
  Top Layer w15: 742.87,3374.02 785.39,3374.02 797.97,3361.44 804.57,3361.44 806.76,3359.25 853.35,3359.25
"NetQ2_Balance Circuit1_1": "Q2_Balance Circuit1.1" "R22_Balance Circuit1.1" | length 848.9
  Top Layer w15: v2(558.07,906.5) 558.07,943.9 ; v1(906.5,823.82) 922.61,839.93 922.61,848.79 936.02,862.2
  Bottom Layer w15: 640.75,823.82 v2(558.07,906.5) 640.75,823.82 ; 640.75,823.82 904.25,823.82 640.75,823.82
"NetQ2_Balance Circuit2_1": "Q2_Balance Circuit2.1" "R22_Balance Circuit2.1" | length 848.9
  Top Layer w15: v2(558.07,1241.14) 558.07,1278.54 ; v1(906.5,1158.46) 922.61,1174.58 922.61,1183.44 936.02,1196.85
  Bottom Layer w15: 640.75,1158.46 v2(558.07,1241.14) 640.75,1158.46 ; 640.75,1158.46 904.25,1158.46 640.75,1158.46
"NetQ2_Balance Circuit3_1": "Q2_Balance Circuit3.1" "R22_Balance Circuit3.1" | length 848.9
  Top Layer w15: v2(558.07,1575.79) 558.07,1613.19 ; v1(906.5,1493.11) 922.61,1509.22 922.61,1518.08 936.02,1531.5
  Bottom Layer w15: 640.75,1493.11 v2(558.07,1575.79) 640.75,1493.11 ; 640.75,1493.11 904.25,1493.11 640.75,1493.11
"NetQ2_Balance Circuit4_1": "Q2_Balance Circuit4.1" "R22_Balance Circuit4.1" | length 848.9
  Top Layer w15: v2(558.07,1910.43) 558.07,1947.83 ; v1(906.5,1827.76) 922.61,1843.87 922.61,1852.73 936.02,1866.14
  Bottom Layer w15: 640.75,1827.76 v2(558.07,1910.43) 640.75,1827.76 ; 640.75,1827.76 904.25,1827.76 640.75,1827.76
"NetQ2_Balance Circuit5_1": "Q2_Balance Circuit5.1" "R22_Balance Circuit5.1" | length 848.9
  Top Layer w15: v2(558.07,2245.08) 558.07,2282.48 ; v1(906.5,2162.4) 922.61,2178.52 922.61,2187.37 936.02,2200.79
  Bottom Layer w15: 640.75,2162.4 v2(558.07,2245.08) 640.75,2162.4 ; 640.75,2162.4 904.25,2162.4 640.75,2162.4
"NetQ2_Balance Circuit6_1": "Q2_Balance Circuit6.1" "R22_Balance Circuit6.1" | length 848.9
  Top Layer w15: v2(558.07,2579.72) 558.07,2617.13 ; v1(906.5,2497.05) 922.61,2513.16 922.61,2522.02 936.02,2535.43
  Bottom Layer w15: 640.75,2497.05 v2(558.07,2579.72) 640.75,2497.05 ; 640.75,2497.05 904.25,2497.05 640.75,2497.05
"NetQ2_Balance Circuit7_1": "Q2_Balance Circuit7.1" "R22_Balance Circuit7.1" | length 848.9
  Top Layer w15: v2(558.07,2914.37) 558.07,2951.77 ; v1(906.5,2831.69) 922.61,2847.81 922.61,2856.66 936.02,2870.08
  Bottom Layer w15: 640.75,2831.69 v2(558.07,2914.37) 640.75,2831.69 ; 640.75,2831.69 904.25,2831.69 640.75,2831.69
"NetQ2_Balance Circuit8_1": "Q2_Balance Circuit8.1" "R22_Balance Circuit8.1" | length 848.9
  Top Layer w15: v2(558.07,3249.02) 558.07,3286.42 ; v1(906.5,3166.34) 922.61,3182.45 922.61,3191.31 936.02,3204.72
  Bottom Layer w15: 640.75,3166.34 v2(558.07,3249.02) 640.75,3166.34 ; 640.75,3166.34 904.25,3166.34 640.75,3166.34
NetR3_1: R3.1 U1.1
NetR5_1: R5.1 R6.2 U1.36 | length 100.9
  Top Layer w8: v1(1478.35,2057.09) 1480.44,2057.09 1490.54,2067.18 1536.67,2067.18 U1.36@1537.4,2067.91 ; R5.1@1687.01,2019.68 v1(1687.01,2057.09)
NetU1_33: U1.33 U2.1
NTC1: "R25_NTC Sense1.1" "R26_NTC Sense1.2" J5.5 | length 59.1
  Bottom Layer w10: 2395.67,1950.79 2395.67,2009.84
NTC2: "R25_NTC Sense2.1" "R26_NTC Sense2.2" J5.4 | length 59.1
  Bottom Layer w10: 2395.67,2092.52 2395.67,2151.57
NTC3: "R25_NTC Sense3.1" "R26_NTC Sense3.2" J5.3 | length 59.1
  Bottom Layer w10: 2395.67,2234.25 2395.67,2293.31
NTC4: "R25_NTC Sense4.1" "R26_NTC Sense4.2" J5.2 | length 59.1
  Bottom Layer w10: 2395.67,2375.98 2395.67,2435.04
NTC5: "R25_NTC Sense5.1" "R26_NTC Sense5.2" J5.1 | length 59.1
  Bottom Layer w10: 2395.67,2517.72 2395.67,2576.77
NTC6: "R25_NTC Sense6.1" "R26_NTC Sense6.2" J6.7 | length 59.1
  Bottom Layer w10: 2395.67,2659.45 2395.67,2718.5
NTC7: "R25_NTC Sense7.1" "R26_NTC Sense7.2" J6.6 | length 59.1
  Bottom Layer w10: 2395.67,2801.18 2395.67,2860.24
NTC8: "R25_NTC Sense8.1" "R26_NTC Sense8.2" J6.5 | length 59.1
  Bottom Layer w10: 2395.67,2942.91 2395.67,3001.97
NTC9: "R25_NTC Sense9.1" "R26_NTC Sense9.2" J6.4 | length 59.1
  Bottom Layer w10: 2395.67,3084.65 2395.67,3143.7
NTC10: "R25_NTC Sense10.1" "R26_NTC Sense10.2" J6.3 | length 59.1
  Bottom Layer w10: 2395.67,3226.38 2395.67,3285.43
NTC11: "R25_NTC Sense11.1" "R26_NTC Sense11.2" J6.2 | length 59.1
  Bottom Layer w10: 2395.67,3368.11 2395.67,3427.17
NTC12: "R25_NTC Sense12.1" "R26_NTC Sense12.2" J6.1 | length 59.1
  Bottom Layer w10: 2395.67,3509.84 2395.67,3568.9
NTC13: "R25_NTC Sense13.1" "R26_NTC Sense13.2" J7.4 | length 59.1
  Bottom Layer w10: 2395.67,3651.58 2395.67,3710.63
NTC14: "R25_NTC Sense14.1" "R26_NTC Sense14.2" J7.3 | length 59.1
  Bottom Layer w10: 2395.67,3793.31 2395.67,3852.36
NTC15: "R25_NTC Sense15.1" "R26_NTC Sense15.2" J7.2 | length 59.1
  Bottom Layer w10: 2395.67,3935.04 2395.67,3994.09
NTC16: "R25_NTC Sense16.1" "R26_NTC Sense16.2" J7.1 | length 59.1
  Bottom Layer w10: 2395.67,4076.77 2395.67,4135.83
Out1: "C13_NTC Sense1.2" "R26_NTC Sense1.1" U2.9 | length 58.9
  Bottom Layer w10: 2452.76,2009.84 2508.86,2009.84 2510.83,2011.81
Out2: "C13_NTC Sense2.2" "R26_NTC Sense2.1" U2.8 | length 58.9
  Bottom Layer w10: 2452.76,2151.57 2508.86,2151.57 2510.83,2153.54
Out3: "C13_NTC Sense3.2" "R26_NTC Sense3.1" U2.7 | length 58.9
  Bottom Layer w10: 2452.76,2293.31 2508.86,2293.31 2510.83,2295.28
Out4: "C13_NTC Sense4.2" "R26_NTC Sense4.1" U2.6 | length 58.9
  Bottom Layer w10: 2452.76,2435.04 2508.86,2435.04 2510.83,2437.01
Out5: "C13_NTC Sense5.2" "R26_NTC Sense5.1" U2.5 | length 58.9
  Bottom Layer w10: 2452.76,2576.77 2508.86,2576.77 2510.83,2578.74
Out6: "C13_NTC Sense6.2" "R26_NTC Sense6.1" U2.4 | length 58.9
  Bottom Layer w10: 2452.76,2718.5 2508.86,2718.5 2510.83,2720.47
Out7: "C13_NTC Sense7.2" "R26_NTC Sense7.1" U2.3 | length 58.9
  Bottom Layer w10: 2452.76,2860.24 2508.86,2860.24 2510.83,2862.2
Out8: "C13_NTC Sense8.2" "R26_NTC Sense8.1" U2.2 | length 58.9
  Bottom Layer w10: 2452.76,3001.97 2508.86,3001.97 2510.83,3003.94
Out9: "C13_NTC Sense9.2" "R26_NTC Sense9.1" U2.23 | length 58.9
  Bottom Layer w10: 2452.76,3143.7 2508.86,3143.7 2510.83,3145.67
Out10: "C13_NTC Sense10.2" "R26_NTC Sense10.1" U2.22 | length 58.9
  Bottom Layer w10: 2452.76,3285.43 2508.86,3285.43 2510.83,3287.4
Out11: "C13_NTC Sense11.2" "R26_NTC Sense11.1" U2.21 | length 58.9
  Bottom Layer w10: 2452.76,3427.17 2508.86,3427.17 2510.83,3429.13
Out12: "C13_NTC Sense12.2" "R26_NTC Sense12.1" U2.20 | length 58.9
  Bottom Layer w10: 2452.76,3568.9 2508.86,3568.9 2510.83,3570.87
Out13: "C13_NTC Sense13.2" "R26_NTC Sense13.1" U2.19 | length 58.9
  Bottom Layer w10: 2452.76,3710.63 2508.86,3710.63 2510.83,3712.6
Out14: "C13_NTC Sense14.2" "R26_NTC Sense14.1" U2.18 | length 58.9
  Bottom Layer w10: 2452.76,3852.36 2508.86,3852.36 2510.83,3854.33
Out15: "C13_NTC Sense15.2" "R26_NTC Sense15.1" U2.17 | length 58.9
  Bottom Layer w10: 2452.76,3994.09 2508.86,3994.09 2510.83,3996.06
Out16: "C13_NTC Sense16.2" "R26_NTC Sense16.1" U2.16 | length 58.9
  Bottom Layer w10: 2452.76,4135.83 2508.86,4135.83 2510.83,4137.8
PORTA_N: J4.1 T1.3
PORTA_P: J4.2 T1.1
S1: "R22_Balance Circuit1.2" U1.25
S2: "R22_Balance Circuit2.2" U1.23
S3: "R22_Balance Circuit3.2" U1.21
S4: "R22_Balance Circuit4.2" U1.19
S5: "R22_Balance Circuit5.2" U1.13
S6: "R22_Balance Circuit6.2" U1.11
S7: "R22_Balance Circuit7.2" U1.9
S8: "R22_Balance Circuit8.2" U1.7
T8: "F2_Balance Circuit8.2" "Q2_Balance Circuit8.2" "R21_Balance Circuit8.1" NT2.1 | length 462.8
  Top Layer w8: 558.07,3211.61 571.85,3197.83 697.83,3197.83 827.76,3327.76 875,3327.76 936.02,3266.73
VBat: NT2.2 R1.2 R3.2
Vc0: F1.1 J1.4
Vc1: "F2_Balance Circuit1.1" J1.3 | length 376.8
  Top Layer w31.5: J1.3@274.61,1197.84 332.68,1197.84 389.37,1141.15 389.37,902.56
Vc2: "F2_Balance Circuit2.1" J1.2 | length 114.8
  Top Layer w31.5: J1.2@274.61,1237.21 389.37,1237.21
Vc3: "F2_Balance Circuit3.1" J1.1 | length 376.8
  Top Layer w31.5: J1.1@274.61,1276.58 332.68,1276.58 389.37,1333.27 389.37,1571.85
Vc4: "F2_Balance Circuit4.1" J2.5 | length 624.6
  Top Layer w31.5: J2.5@298.23,2493.31 339.57,2451.97 339.57,2197.79 389.37,2147.98 389.37,1906.5
Vc5: "F2_Balance Circuit5.1" J2.4 | length 375.7
  Top Layer w31.5: J2.4@274.61,2536.42 330.71,2536.42 389.37,2477.76 389.37,2241.14
Vc6: "F2_Balance Circuit6.1" J2.3 | length 114.8
  Top Layer w31.5: J2.3@274.61,2575.79 389.37,2575.79
Vc7: "F2_Balance Circuit7.1" J2.2 | length 375.7
  Top Layer w31.5: J2.2@274.61,2615.16 330.71,2615.16 389.37,2673.82 389.37,2910.43
Vc8: "F2_Balance Circuit8.1" J2.1 | length 624.6
  Top Layer w31.5: J2.1@298.23,2658.27 339.57,2699.61 339.57,2953.79 389.37,3003.59 389.37,3245.08
VREF1: C2.2 C3.2 TP1.1 U1.35 | length 112.1
  Top Layer w10: U1.35@1537.4,2048.23 1637.8,2048.23 1644.69,2055.12 C3.2@1646.65,2055.12
VREF2: "R25_NTC Sense1.2" "R25_NTC Sense2.2" "R25_NTC Sense3.2" "R25_NTC Sense4.2" "R25_NTC Sense5.2" "R25_NTC Sense6.2" "R25_NTC Sense7.2" "R25_NTC Sense8.2" "R25_NTC Sense9.2" "R25_NTC Sense10.2" "R25_NTC Sense11.2" "R25_NTC Sense12.2" "R25_NTC Sense13.2" "R25_NTC Sense14.2" "R25_NTC Sense15.2" "R25_NTC Sense16.2" C4.2 C5.2 TP2.1 U1.34 | length 1217.6
  Top Layer w10: U1.34@1537.4,2028.54 1634.09,2028.54 1637.87,2024.76 1637.87,2024.53 1644.69,2017.72 C5.2@1646.65,2017.72
  Bottom Layer w8: v1(2397.64,1917.32) 2419.29,1917.32 2452.76,1950.79 ; v1(2397.64,2059.05) 2419.29,2059.05 2452.76,2092.52 ; v1(2397.64,2200.79) 2419.29,2200.79 2452.76,2234.25 ; v1(2397.64,2342.52) 2419.29,2342.52 2452.76,2375.98 ; v1(2397.64,2484.25) 2419.29,2484.25 2452.76,2517.72 ; v1(2397.64,2625.98) 2419.29,2625.98 2452.76,2659.45 ; v1(2397.64,2767.72) 2419.29,2767.72 2452.76,2801.18 ; v1(2397.64,2909.45) 2419.29,2909.45 2452.76,2942.91 ; v1(2397.64,3051.18) 2419.29,3051.18 2452.76,3084.65 ; v1(2397.64,3192.91) 2419.29,3192.91 2452.76,3226.38 ; v1(2397.64,3334.65) 2419.29,3334.65 2452.76,3368.11 ; v1(2397.64,3476.38) 2419.29,3476.38 2452.76,3509.84 ; v1(2397.64,3618.11) 2419.29,3618.11 2452.76,3651.57 ; v1(2397.64,3759.84) 2419.29,3759.84 2452.76,3793.31 ; v1(2397.64,3901.57) 2419.29,3901.57 2452.76,3935.04 ; v1(2397.64,4043.31) 2419.29,4043.31 2452.76,4076.77
  other v1: 1377.95,2022.64 1427.17,2022.64 1476.38,2022.64
WDT: R2.1 U1.39 | length 135.6
  Top Layer w6: U1.39@1537.4,2126.97 1583.73,2126.97 1583.87,2126.83 1667.18,2126.83 R2.1@1671.26,2130.91
pads on no net: J1.S1 J1.S2 J2.S1 J2.S2 J4.P1 J4.P2 T1. T1.2 U1.3 U1.5 U1.15 U1.17

## Polygon pours and split planes (outlines as drawn)
VBat on Top Layer "NONET_L-01_P-001" (solid, remove dead copper, pour order 39): 1046.26,3317.91 1356.3,3317.91 1356.3,3488.19 494.98,3488.19 494.98,3294.88 540.35,3294.88 642.72,3409.06 1046.26,3409.06
T8 on Top Layer "Top Layer-T8" (solid, remove dead copper, pour order 32): 469.49,3197.83 469.49,3282.42 536.42,3282.42 536.42,3245.08 556.1,3225.39 571.85,3225.39 571.85,3197.83
5V0 on Top Layer "NONET_L-01_P-001" (solid, pour order 36): 1313.98,3051.18 1313.98,2993.11 1304.13,2983.27 1304.13,2943.9 1440.94,2943.9 1440.94,3051.18
NetC1_2 on Top Layer "Top Layer-NetC9_2" (solid, remove dead copper, pour order 37): 1307.09,3096.46 1503.94,3096.46 1503.94,3116.14 1523.62,3135.83 1523.62,3303.15 1191.93,3303.15 1131.89,3243.11 1131.89,3184.06 1236.22,3184.06 1236.22,3116.14 1307.09,3116.14
GND on Top Layer "NONET_L-01_P-001" (solid, remove dead copper, pour order 35): 185.04,911.81 352.36,911.81 352.36,754.33 185.04,754.33
Vc0 on Top Layer "NONET_L-01_P-001" (solid, remove dead copper, pour order 34): 244.1,1176.18 244.1,957.68 352.36,957.68 352.36,1176.18
VREF2 on Top Layer "NONET_L-01_P-001" (solid, remove dead copper, pour order 33): 1348.43,2002.95 1555.12,2002.95 1555.12,2042.32 1348.43,2042.32
B8 on Top Layer "Top Layer-B8" (solid, remove dead copper, pour order 31): 469.49,2863.19 571.85,2863.19 571.85,2890.75 556.1,2890.75 536.42,2910.43 536.42,2965.55 638.78,3067.91 808.07,3067.91 808.07,3150.59 563.98,3150.59 469.49,3056.1 469.49,2953.74
B7 on Top Layer "Top Layer-B7" (solid, remove dead copper, pour order 30): 469.49,2528.54 571.85,2528.54 571.85,2556.1 556.1,2556.1 536.42,2575.79 536.42,2630.91 638.78,2733.27 808.07,2733.27 808.07,2815.95 563.98,2815.94 469.49,2721.46 469.49,2619.09
B6 on Top Layer "Top Layer-B6" (solid, remove dead copper, pour order 29): 469.49,2193.9 571.85,2193.9 571.85,2221.46 556.1,2221.46 536.42,2241.14 536.42,2296.26 638.78,2398.62 808.07,2398.62 808.07,2481.3 563.98,2481.3 469.49,2386.81 469.49,2284.45
B5 on Top Layer "Top Layer-B5" (solid, remove dead copper, pour order 28): 469.49,1859.25 571.85,1859.25 571.85,1886.81 556.1,1886.81 536.42,1906.5 536.42,1961.61 638.78,2063.98 808.07,2063.98 808.07,2146.65 563.98,2146.65 469.49,2052.17 469.49,1949.8
B4 on Top Layer "Top Layer-B4" (solid, remove dead copper, pour order 27): 469.49,1524.61 571.85,1524.61 571.85,1552.17 556.1,1552.17 536.42,1571.85 536.42,1626.97 638.78,1729.33 808.07,1729.33 808.07,1812.01 563.98,1812.01 469.49,1717.52 469.49,1615.16
B3 on Top Layer "Top Layer-B3" (solid, remove dead copper, pour order 26): 469.49,1189.96 571.85,1189.96 571.85,1217.52 556.1,1217.52 536.42,1237.2 536.42,1292.32 638.78,1394.68 808.07,1394.68 808.07,1477.36 563.98,1477.36 469.49,1382.87 469.49,1280.51
"NetD2_Balance Circuit2_2" on Top Layer "NONET_L-01_P-001" (solid, remove dead copper, pour order 24): 611.22,1225.39 705.71,1225.39 808.07,1327.76 808.07,1394.68 638.78,1394.68 611.22,1367.13
"NetD2_Balance Circuit1_2" on Top Layer "NONET_L-01_P-001" (solid, remove dead copper, pour order 23): 611.22,890.75 705.71,890.75 808.07,993.11 808.07,1060.04 638.78,1060.04 611.22,1032.48
"NetD2_Balance Circuit7_2" on Top Layer "NONET_L-01_P-001" (solid, remove dead copper, pour order 22): 611.22,2898.62 705.71,2898.62 808.07,3000.98 808.07,3067.91 638.78,3067.91 611.22,3040.35
"NetD2_Balance Circuit4_2" on Top Layer "NONET_L-01_P-001" (solid, remove dead copper, pour order 21): 611.22,1894.68 705.71,1894.68 808.07,1997.05 808.07,2063.98 638.78,2063.98 611.22,2036.42
"NetD2_Balance Circuit5_2" on Top Layer "NONET_L-01_P-001" (solid, remove dead copper, pour order 20): 611.22,2229.33 705.71,2229.33 808.07,2331.69 808.07,2398.62 638.78,2398.62 611.22,2371.06
"NetD2_Balance Circuit3_2" on Top Layer "NONET_L-01_P-001" (solid, remove dead copper, pour order 19): 611.22,1560.04 705.71,1560.04 808.07,1662.4 808.07,1729.33 638.78,1729.33 611.22,1701.77
"NetD2_Balance Circuit8_2" on Top Layer "NONET_L-01_P-001" (solid, remove dead copper, pour order 18): 611.22,3233.27 705.71,3233.27 808.07,3335.63 808.07,3402.56 638.78,3402.56 611.22,3375
"NetD2_Balance Circuit6_2" on Top Layer "NONET_L-01_P-001" (solid, remove dead copper, pour order 17): 611.22,2563.98 705.71,2563.98 808.07,2666.34 808.07,2733.27 638.78,2733.27 611.22,2705.71
B2 on Top Layer "Top Layer-B2" (solid, remove dead copper, pour order 25): 469.49,855.31 571.85,855.31 571.85,855.32 571.85,882.87 556.1,882.87 536.42,902.56 536.42,957.68 638.78,1060.04 808.07,1060.04 808.07,1142.72 563.98,1142.72 469.49,1048.23 469.49,945.87
GND on L2 (GND) (split plane): 2105.89,20.1 20.1,20.1 20.1,4164.94 2105.89,4164.94
5V0 on L2 (PWR) (split plane): 2105.89,20.1 20.1,20.1 20.1,4164.94 2105.89,4164.94

## Silkscreen, mask and mechanical layers (free items; w line width, h text height)
Board Shape:
  the board outline again, w3.94